# Altium PCB sdc_no-prech_pcb.PcbDoc
Units mm, origin at the board's own origin, x right, y up, seen from the top; angles counter-clockwise.
Board outline 80 x 55 mm, 2 copper layers (Top Layer, Bottom Layer); 41 components, 28 nets, 123 pads, 20 vias.
Unrouted connection lines stored in the file: 40.
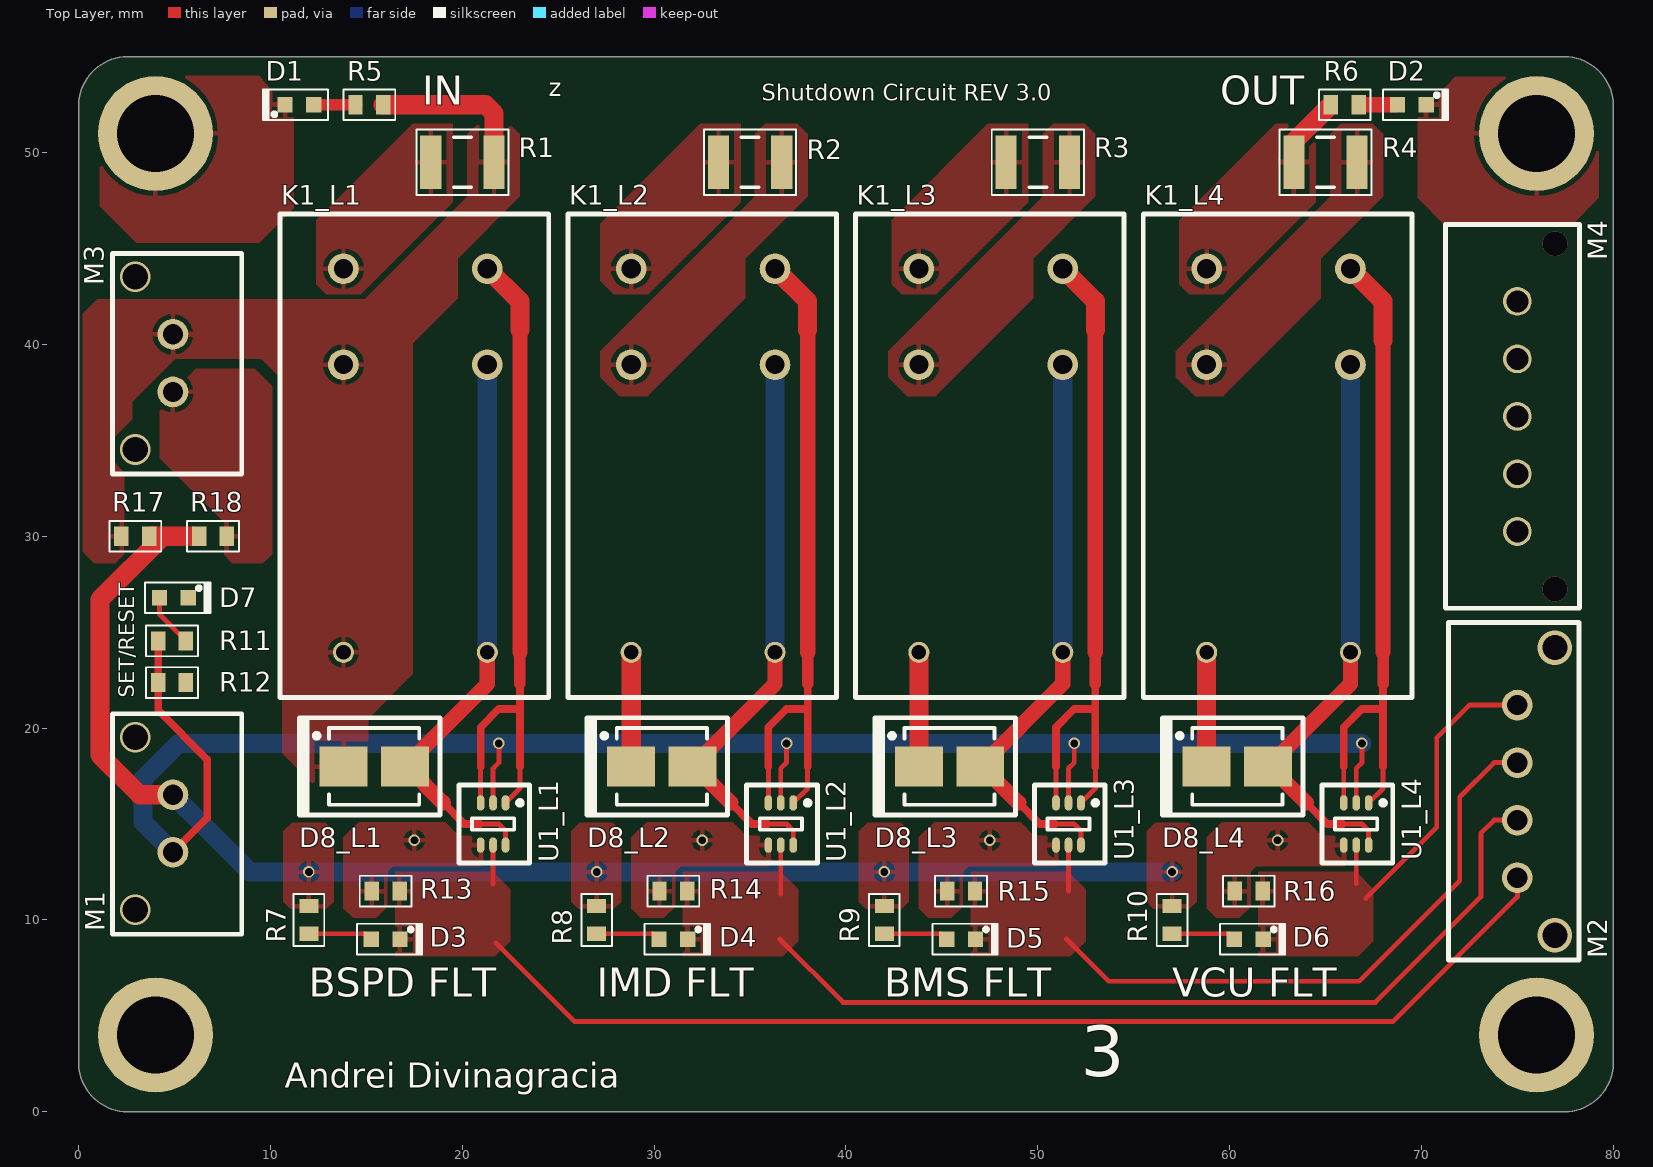
[diagram p0: Top Layer view]
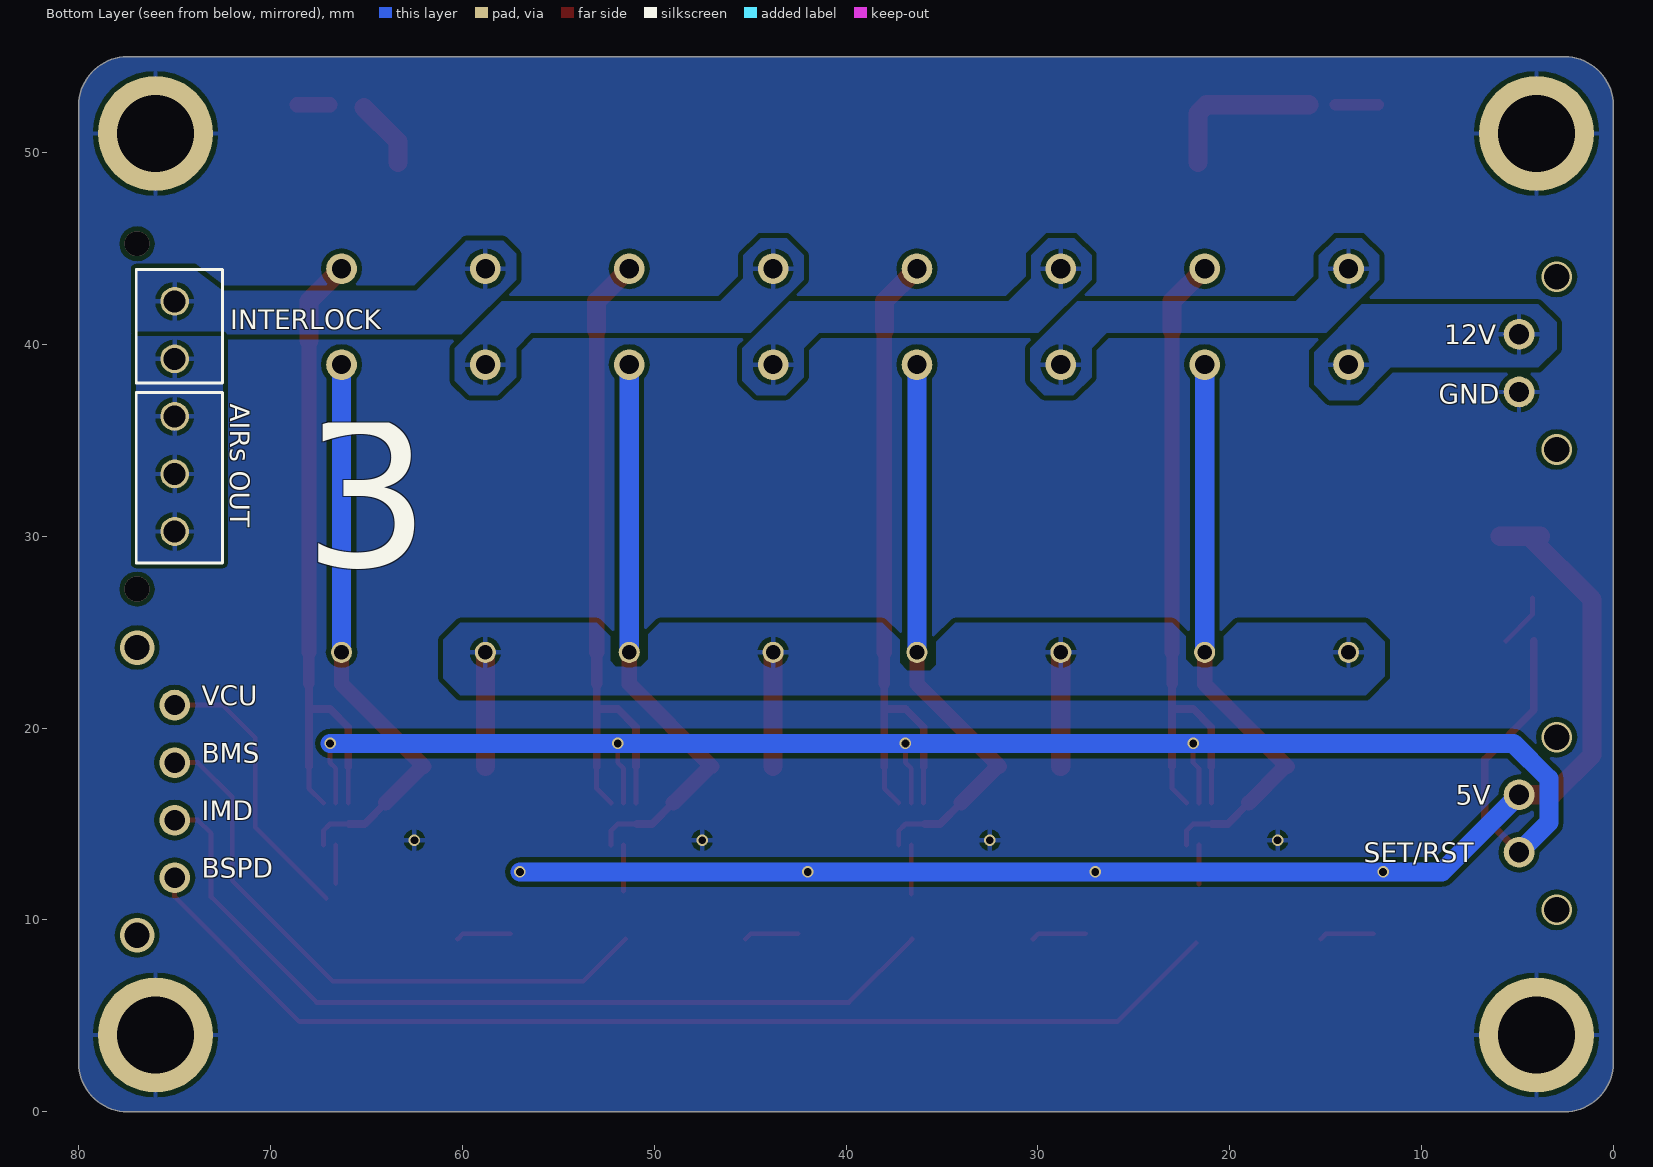
[diagram p1: Bottom Layer view, seen from below]

## Layer stack, top to bottom
Top Solder: solder mask 0.0102, Solder Resist, Dk 3.5
Top Layer: signal copper 0.0356
Dielectric 1: dielectric 0.32, FR-4, Dk 4.8
Bottom Layer: signal copper 0.0356
Bottom Solder: solder mask 0.0102, Solder Resist, Dk 3.5

## Board outline
0,52.46 cw(c2.54,52.46) 2.54,55 77.46,55 cw(c77.46,52.46) 80,52.46 80,2.54 cw(c77.46,2.54) 77.46,0 2.54,0 cw(c2.54,2.54) 0,2.54

## Design rules (kind name [scope] priority, off if disabled: settings)
Clearance [All] p1: gap=0.254 ignorepadtopadclearanceinfootprint=TRUE except(0: Arc-Hole Track-Hole SMDPad-Hole THPad-Hole Via-Hole Fill-Hole Poly-Hole Region-Hole Text-Hole)
PolygonConnect [All] p1: connectstyle=Relief reliefconductorwidth=0.254 reliefentries=4 polygonreliefangle="90 Angle" airgapwidth=0.254
RoutingVias [All] p1: holewidth=0.711 width=1.27 viastyle="Through Hole" minholewidth=0.711 minwidth=1.27 maxholewidth=0.711 maxwidth=1.27
SolderMaskExpansion [All] p1: expansion=0.102
Width [All] p1: maxlimit=1 minlimit=0.1 preferedwidth=0.254 minimp=50.000000 maximp=50.000000 favimp=50.000000
30 further rules are at their usual default settings.

## Classes and differential pairs
channel class Latch: L1 L2 L3 L4
component class shutdown_circuit: D1 D2 D3 D4 D5 D6 D7 M1 M2 M3 M4 R1 R2 R3 R4 R5 R6 R7 R8 R9 R10 R11 R12 R13 R14 R15 R16 R17 R18
component class L4: D8_L4 K1_L4 U1_L4
component class L3: D8_L3 K1_L3 U1_L3
component class L2: D8_L2 K1_L2 U1_L2
component class L1: D8_L1 K1_L1 U1_L1

## Components (designator, comment, footprint, x,y, rotation, side; value= is the part's Value field where it differs from the comment)
D1 "BLUE" "LED 0603" 11.5,52.5 r180 top
D2 "BLUE" "LED 0603" 69.5,52.5 r0 top
D3 "YELLOW" "LED 0603" 16,9 r0 top
D4 "YELLOW" "LED 0603" 31,9 r0 top
D5 "YELLOW" "LED 0603" 46,9 r0 top
D6 "YELLOW" "LED 0603" 61,9 r0 top
D7 "YELLOW" "LED 0603" 4.963,26.798 r0 top
D8_L1 "SD560BTR" DIODE 15.4,18 r0 top (schematic designator D8)
D8_L2 "SD560BTR" DIODE 30.4,18 r0 top (schematic designator D8)
D8_L3 "SD560BTR" DIODE 45.4,18 r0 top (schematic designator D8)
D8_L4 "SD560BTR" DIODE 60.4,18 r0 top (schematic designator D8)
K1_L1 "5-1419124-6" "RELAY DPST SDC" 24,22 r90 top (schematic designator K1)
K1_L2 "5-1419124-6" "RELAY DPST SDC" 39,22 r90 top (schematic designator K1)
K1_L3 "5-1419124-6" "RELAY DPST SDC" 54,22 r90 top (schematic designator K1)
K1_L4 "5-1419124-6" "RELAY DPST SDC" 69,22 r90 top (schematic designator K1)
M1 "0436500228" "2-PIN MOLEX" 5,15 r270 top
M2 "0436500428" "4-PIN MOLEX" 74.91,16.7 r90 top
M3 "0436500228" "2-PIN MOLEX" 5,39 r270 top
M4 "5pin" "5-PIN MOLEX" 75,30.25 r90 top
R1 "0Ω" "RESISTOR 1210" 20,49.5 r180 top
R2 "0Ω" "RESISTOR 1210" 35,49.5 r180 top
R3 "0Ω" "RESISTOR 1210" 50,49.5 r180 top
R4 "0Ω" "RESISTOR 1210" 65,49.5 r180 top
R5 "1KΩ" "RESISTOR 0603" 15.15,52.5 r180 top
R6 "1KΩ" "RESISTOR 0603" 66,52.5 r0 top
R7 "220Ω" "RESISTOR 0603" 12,10 r270 top
R8 "220Ω" "RESISTOR 0603" 27,10 r90 top
R9 "220Ω" "RESISTOR 0603" 42,10 r90 top
R10 "220Ω" "RESISTOR 0603" 57,10 r270 top
R11 "1KΩ" "RESISTOR 0603" 4.861,24.548 r0 top
R12 "10KΩ" "RESISTOR 0603" 4.861,22.373 r0 top
R13 "10KΩ" "RESISTOR 0603" 16,11.5 r180 top
R14 "10KΩ" "RESISTOR 0603" 31,11.5 r180 top
R15 "10KΩ" "RESISTOR 0603" 46,11.5 r180 top
R16 "10KΩ" "RESISTOR 0603" 61,11.5 r180 top
R17 "1.4KΩ" "RESISTOR 0603" 2.95,30 r180 top
R18 "1KΩ" "RESISTOR 0603" 7,30 r180 top
U1_L1 "SSM6N7002CFU,LF" "N-MOSFET (2 FETS)" 21.6,15 r270 top (schematic designator U1)
U1_L2 "SSM6N7002CFU,LF" "N-MOSFET (2 FETS)" 36.6,15 r270 top (schematic designator U1)
U1_L3 "SSM6N7002CFU,LF" "N-MOSFET (2 FETS)" 51.6,15 r270 top (schematic designator U1)
U1_L4 "SSM6N7002CFU,LF" "N-MOSFET (2 FETS)" 66.6,15 r270 top (schematic designator U1)

## Footprints (in the part's own frame and the unit in brackets; to place one, negate y for a bottom-side part, rotate by r counter-clockwise, add the part's x,y. Pads: shape width x height; smd on the part's side, far side on the other; paste and mask are expansions set on the pad)
"2-PIN MOLEX" [mm]
  round 1.6 hole 1.06: 1(-1.525,-0.09) 2(1.475,-0.09)
  silkscreen extent -5.75,-3.25 5.75,3.5, body extent -4.82,-2.47 4.83,3.14, height 9.95
"4-PIN MOLEX" [mm]
  round 1.6 hole 1.06: 1(-4.5,-0.09) 2(-1.5,-0.09) 3(1.5,-0.09) 4(4.5,-0.09)
  silkscreen extent -8.8,-3.3 8.8,3.5, body extent -7.82,-2.47 7.83,3.14, height 9.95
"5-PIN MOLEX" [mm]
  round 1.5 hole 1.15: 1(0,0) 2(3,0) 3(6,0) 4(9,0) 5(12,0)
  silkscreen extent -4,-3.25 16,3.75, body extent -3.32,-2.47 15.32,3.14, height 10.45
DIODE [mm] "Molded Diode, 2-Leads, Body 4.38x3.62mm, IPC Medium Density"
  rect 2.5x2.1 smd: 1(1.6,0) 2(-1.6,0)
  silkscreen extent -3.9,-2.54 3.43,2.54, body extent -2.35,-1.97 2.35,1.97, height 2.6
"LED 0603" [mm]
  rect 0.8x0.8 smd: 1(-0.75,0) 2(0.75,0)
  silkscreen extent -1.5,-0.8 1.9,0.8, body extent -0.8,-0.4 0.8,0.4, height 0.39
"N-MOSFET (2 FETS)" [mm] "TSOP, 6-Leads, Body 2.00x1.25mm, Pitch 0.65mm, IPC Medium Density"
  oval 0.8x0.4 smd: 1(-1.1,0.65) 2(-1.1,0) 3(-1.1,-0.65) 4(1.1,-0.65) 5(1.1,0) 6(1.1,0.65)
  silkscreen extent -2.03,-1.78 2.03,1.9, body extent -1.05,-1.1 1.05,1.1, height 1.1
"RELAY DPST SDC" [mm]
  round 1.1 hole 0.762: 1(1.95,2.7) 6(1.95,10.2)
  round 1.6 hole 1: 2(16.95,2.7) 3(21.95,2.7) 4(21.95,10.2) 5(16.95,10.2)
  silkscreen extent -0.4,-0.5 24.8,13.5, body extent 0,0 24.4,12.9, height 24.51
"RESISTOR 0603" [mm] "Chip Resistor, 2-Leads, Body 1.58x0.85mm, IPC Medium Density"
  rect 0.75x1 smd: 1(-0.725,0) 2(0.725,0)
  silkscreen extent -1.35,-0.8 1.35,0.8, body extent -0.82,-0.48 0.82,0.47, height 0.5
"RESISTOR 1210" [mm] "Chip Resistor, 2-Leads, Body 3.20x2.50mm, IPC Medium Density"
  rect 1.1x2.8 smd: 1(-1.65,0) 2(1.65,0)
  silkscreen extent -2.4,-1.7 2.4,1.7, body extent -1.7,-1.35 1.7,1.35, height 0.6

## Part data
D1 D2: library part LTST-C191TBKT-5A, "LED BLUE CLEAR CHIP SMD", Case/Package=0603, Case Code (Metric)=1608, Color=Blue, Forward Current=20mA, Forward Voltage=2.8V, Lens Color=Colorless, Manufacturer="Vishay Lite-On", Max Operating Temperature=80°C, Min Operating Temperature=-20°C, Package Quantity=5000, Supplier Part Number 1=160-2212-6-ND, Test Current=5mA, Voltage=29V, Case Code (Imperial)=0603, Category=Optoelectronics, ComponentLink1Description=http://optoelectronics.liteon.com/upload/download/DS22-2003-020/LTST-C191TBKT-5A.pdf?src-supplier=Digi-Key, ComponentLink1URL=http://optoelectronics.liteon.com/upload/download/DS22-2003-020/LTST-C191TBKT-5A.pdf?src-supplier=Digi-Key, ComponentLink2Description=http://components.arrow.com/part/dataview/52218576S9813001N1331?src-supplier=Arrow, ComponentLink2URL=http://components.arrow.com/part/dataview/52218576S9813001N1331?src-supplier=Arrow, ComponentLink3Description=http://optoelectronics.liteon.com/zh-cn/api/DwonloadFileHandler.ashx?txtSpecNo=DS22-2003-020&txtPartNo=LTST-C191TBKT-5A&src-supplier=Avnet, ComponentLink3URL=http://optoelectronics.liteon.com/zh-cn/api/DwonloadFileHandler.ashx?txtSpecNo=DS22-2003-020&txtPartNo=LTST-C191TBKT-5A&src-supplier=Avnet, ComponentLink4Description=http://www.mouser.com/ds/2/239/LTST-C191TBKT-5A-1150649.pdf?src-supplier=Mouser, ComponentLink4URL=http://www.mouser.com/ds/2/239/LTST-C191TBKT-5A-1150649.pdf?src-supplier=Mouser, Dominant Wavelength=473nm, Height=0.55mm, Illumination Color=Blue, Length=1.6mm, Lens Style=Diffused,Colorless,Rectangular, Lens Transparency=Clear, Luminous Intensity=15mcd, Manufacturer Part Number=LTST-C191TBKT-5A, Mount="Surface Mount", Number of LEDs=1, Number of Pins=2, Packaging="Tape and Reel", Pricing 1="1=0.5, 10=0.359, 100=0.1596, 500=0.11172, 1000=0.09177, 2500=0.0798 (USD)", Radiation Hardening=No, Stock 1=9654, Supplier 1=Digi-Key, Viewing Angle=130°, Width=0.8mm
D3 D4 D5 D6 D7: library part LTST-C191KSKT, "LED YELLOW CLEAR SMD", Case/Package=0603, Case Code (Metric)=1608, Color=Yellow, Forward Current=30mA, Forward Voltage=2.4V, Lens Color=Colorless, Manufacturer="Vishay Lite-On", Max Operating Temperature=85°C, Min Operating Temperature=-55°C, Package Quantity=1, Power Dissipation=75mW, Reverse Voltage=5V, Supplier Part Number 1=160-1448-6-ND, Test Current=20mA, Case Code (Imperial)=0603, Category=Optoelectronics, ComponentLink1Description=http://optoelectronics.liteon.com/upload/download/DS22-2000-224/LTST-C191KSKT.PDF?src-supplier=Digi-Key, ComponentLink1URL=http://optoelectronics.liteon.com/upload/download/DS22-2000-224/LTST-C191KSKT.PDF?src-supplier=Digi-Key, ComponentLink2Description=https://www.verical.com/server-webapp/html/getDatasheet?partID=141495&src-supplier=Verical, ComponentLink2URL=https://www.verical.com/server-webapp/html/getDatasheet?partID=141495&src-supplier=Verical, ComponentLink3Description=http://www.mouser.com/ds/2/239/LTST-C191KSKT-1141271.pdf?src-supplier=Mouser, ComponentLink3URL=http://www.mouser.com/ds/2/239/LTST-C191KSKT-1141271.pdf?src-supplier=Mouser, ComponentLink4Description=http://www1.futureelectronics.com/doc/LITE%20ON/LITE-ON%20LTST-C191KSKT.pdf?src-supplier=Future+Electronics, ComponentLink4URL=http://www1.futureelectronics.com/doc/LITE%20ON/LITE-ON%20LTST-C191KSKT.pdf?src-supplier=Future+Electronics, Depth=0.8mm, Dominant Wavelength=597nm, Height=0.55mm, Illumination Color=Yellow, Lead Free="Lead Free", Length=1.6mm, Lens Style=Diffused,Colorless,Rectangular,Clear, Lens Transparency=Clear, Luminous Intensity=180mcd, Manufacturer Part Number=LTST-C191KSKT, Mount="Surface Mount", Number of Elements=1, Number of LEDs=1, Number of Pins=2, Packaging="Tape and Reel", Power Rating=75mW, Pricing 1="1=0.29, 10=0.215, 100=0.1016, 500=0.06774, 1000=0.05306, 2500=0.05194 (USD)", Radiation Hardening=No, Stock 1=464545, Supplier 1=Digi-Key, Viewing Angle=130°, Wavelength=588nm, Width=0.8mm
D8_L1 D8_L2 D8_L3 D8_L4: "DIODE GEN PURP 600V 5A SMB", Average Rectified Current=5A, Case/Package=SMB, Manufacturer=SMC, Max Reverse Voltage (DC)=600V, Supplier Part Number 1=1655-1530-6-ND, Category="Discrete Semiconductor Products", ComponentLink1Description=http://www.smc-diodes.com/propdf/SD560B%20N1412%20REV.D.pdf?src-supplier=Digi-Key, ComponentLink1URL=http://www.smc-diodes.com/propdf/SD560B%20N1412%20REV.D.pdf?src-supplier=Digi-Key, Manufacturer Part Number=SD560BTR, Mount="Surface Mount", Packaging="Tape and Reel", Pricing 1="1=0.42, 10=0.309, 100=0.1468, 500=0.11978, 1000=0.08887 (USD)", Stock 1=90144, Supplier 1=Digi-Key
K1_L1 K1_L2 K1_L3 K1_L4: "General Purpose Relay, Osa Series, Power, Non Latching, Dpst-No, 12 Vdc, 3 A Rohs Compliant: Yes", Coil Current=45mA, Coil Power=600mW, Coil Resistance=270R, Coil Voltage (DC)=12V, Contact Current Rating=3A, Contact Voltage Rating (AC)=240V, Manufacturer="TE Connectivity", Max Operating Temperature=60°C, Min Operating Temperature=-30°C, Package Quantity=1000, Supplier Part Number 1=OSA-SS-212DM3,000-ND, Category=Relays, Coil Type=Non-Latching, ComponentLink1Description=http://www.farnell.com/datasheets/1652820.pdf?src-supplier=Farnell, ComponentLink1URL=http://www.farnell.com/datasheets/1652820.pdf?src-supplier=Farnell, ComponentLink2Description=http://www.farnell.com/cad/1652820.pdf?src-supplier=Element14, ComponentLink2URL=http://www.farnell.com/cad/1652820.pdf?src-supplier=Element14, ComponentLink3Description=http://www.te.com/commerce/DocumentDelivery/DDEController?Action=srchrtrv&DocNm=5-1419124-6&DocType=Customer+Drawing&DocLang=English&src-supplier=Digi-Key, ComponentLink3URL=http://www.te.com/commerce/DocumentDelivery/DDEController?Action=srchrtrv&DocNm=5-1419124-6&DocType=Customer+Drawing&DocLang=English&src-supplier=Digi-Key, Contact Material=Silver, ELV=Compliant, Height=0.976inch, Length=24.4mm, Manufacturer Part Number=5-1419124-6, Mount="Through Hole", Operate Time=20ms, Packaging=Box, Pricing 1="1=2.54, 10=2.385, 25=2.1204, 50=2.0142, 100=1.9083, 250=1.69624, 500=1.59022, 1000=1.48421, 5000=1.4312 (USD)", REACH SVHC=Unknown, Relay Type="General Purpose", Release Time=10ms, Stock 1=2593, Supplier 1=Digi-Key, Termination=PCB, Throw Configuration=DPST, Weight=13g, Width=12.9mm
M1 M3: "Conn Power HDR 2 POS 3mm Solder ST Thru-Hole 2 Terminal 1 Port Micro-Fit 3.0™ Tray", Color=Black, Manufacturer=Molex, Max Operating Temperature=105°C, Min Operating Temperature=-40°C, Package Quantity=3264, Supplier Part Number 1=WM10658-ND, Category="Connectors, Interconnects", ComponentLink1Description=http://www.molex.com/pdm_docs/sd/436500228_sd.pdf?src-supplier=Digi-Key, ComponentLink1URL=http://www.molex.com/pdm_docs/sd/436500228_sd.pdf?src-supplier=Digi-Key, ComponentLink2Description=http://components.arrow.com/part/dataview/2942358S8703676N3303?src-supplier=Arrow, ComponentLink2URL=http://components.arrow.com/part/dataview/2942358S8703676N3303?src-supplier=Arrow, Connector Type="Male Pin", Contact Material=Brass, Contact Plating=Gold, Depth=5.57mm, Fastening Type=Ramp, Housing Material=Polymer, Length=9.65mm, Manufacturer Part Number=0436500228, Mount="Through Hole", Number of Contacts=2, Number of Ports=1, Number of Positions=2, Number of Rows=1, Number of Terminals=2, Orientation=Straight, Packaging=Tray, Pitch=3mm, Pricing 1="1=0.9, 10=0.795, 100=0.6857, 500=0.56106, 1000=0.49872, 5000=0.43638, 10000=0.41456 (USD)", Stock 1=9247, Supplier 1=Digi-Key, Termination=Solder
M2: "Conn Power HDR 4 POS 3mm Solder ST Thru-Hole 4 Terminal 1 Port Micro-Fit 3.0™ Tray", Color=Black, Manufacturer=Molex, Max Operating Temperature=105°C, Min Operating Temperature=-40°C, Package Quantity=2040, Supplier Part Number 1=WM10669-ND, Category="Connectors, Interconnects", ComponentLink1Description=http://www.molex.com/pdm_docs/sd/436500428_sd.pdf?src-supplier=Digi-Key, ComponentLink1URL=http://www.molex.com/pdm_docs/sd/436500428_sd.pdf?src-supplier=Digi-Key, ComponentLink2Description=http://www.molex.com/webdocs/datasheets/pdf/en-us/0436500428_PCB_HEADERS.pdf?src-supplier=Avnet, ComponentLink2URL=http://www.molex.com/webdocs/datasheets/pdf/en-us/0436500428_PCB_HEADERS.pdf?src-supplier=Avnet, Connector Type="Male Pin", Contact Material=Brass, Contact Plating=Gold, Depth=5.57mm, Fastening Type=Ramp, Housing Material=Polymer, Length=15.65mm, Manufacturer Part Number=0436500428, Mount="Through Hole", Number of Contacts=4, Number of Ports=1, Number of Positions=4, Number of Rows=1, Number of Terminals=4, Orientation=Straight, Packaging=Tray, Pitch=3mm, Pricing 1="1=1.44, 10=1.265, 100=1.0916, 500=0.89316, 1000=0.79392, 5000=0.69468, 10000=0.65995 (USD)", Stock 1=1193, Supplier 1=Digi-Key, Termination=Solder
M4: library part 0436500527, "CONN HEADER VERT 5POS 3MM", Supplier Part Number 1=0436500527-ND, Supplier 1=Digi-Key
R1 R2 R3 R4: library part CRCW12100000Z0EA, "RES SMD 0 OHM JUMPER 1/2W 1210", Case/Package=1210, Case Code (Metric)=3225, Manufacturer="Vishay Dale", Max Operating Temperature=155°C, Max Power Dissipation=500mW, Min Operating Temperature=-55°C, Package Quantity=1, Resistance=0mR, Supplier Part Number 1=541-0.0VDKR-ND, Temperature Coefficient=0ppm/°C, Voltage Rating=200V, Case Code (Imperial)=1210, Category=Resistors, ComponentLink1Description=http://www.vishay.com/docs/20035/dcrcwe3.pdf?src-supplier=Digi-Key, ComponentLink1URL=http://www.vishay.com/docs/20035/dcrcwe3.pdf?src-supplier=Digi-Key, ComponentLink2Description=http://www.vishay.com/docs/20035/dcrcwe3.pdf?src-supplier=Future+Electronics, ComponentLink2URL=http://www.vishay.com/docs/20035/dcrcwe3.pdf?src-supplier=Future+Electronics, ComponentLink3Description=http://www.farnell.com/datasheets/2793682.pdf?src-supplier=Element14, ComponentLink3URL=http://www.farnell.com/datasheets/2793682.pdf?src-supplier=Element14, ComponentLink4Description=http://www.mouser.com/ds/2/427/dcrcwe3-109170.pdf?src-supplier=Mouser, ComponentLink4URL=http://www.mouser.com/ds/2/427/dcrcwe3-109170.pdf?src-supplier=Mouser, ComponentLink5Description=https://www.alliedelec.com/m/d/0c934d6939ccefa68dbe0b96d821c8cf.pdf?src-supplier=Allied+Electronics, ComponentLink5URL=https://www.alliedelec.com/m/d/0c934d6939ccefa68dbe0b96d821c8cf.pdf?src-supplier=Allied+Electronics, ComponentLink6Description=http://www.vishay.com/docs/20035/dcrcwe3.pdf?src-supplier=Avnet, ComponentLink6URL=http://www.vishay.com/docs/20035/dcrcwe3.pdf?src-supplier=Avnet, ComponentLink7Description=http://www.vishay.com/docs/20035/dcrcwe3.pdf?src-supplier=Avnet+Europe, ComponentLink7URL=http://www.vishay.com/docs/20035/dcrcwe3.pdf?src-supplier=Avnet+Europe, ComponentLink8Description=http://uk.rs-online.com/webdocs/0d98/0900766b80d98bd1.pdf?src-supplier=RSComponents, ComponentLink8URL=http://uk.rs-online.com/webdocs/0d98/0900766b80d98bd1.pdf?src-supplier=RSComponents, Composition="Thick Film", Contact Plating=Tin, Depth=2.5mm, Features="Automotive AEC-Q200", Height=0.55mm, Length=3.2mm, Manufacturer Part Number=CRCW12100000Z0EA, Military Standard=Not, Mount="Surface Mount", Number of Terminations=2, Packaging="Tape and Reel", Power Rating=500mW, Pricing 1="1=0.21, 10=0.182, 25=0.132, 50=0.0958, 100=0.071, 250=0.05444, 500=0.0429, 1000=0.0297 (USD)", Radiation Hardening=No, REACH SVHC="No SVHC", Stock 1=916328, Supplier 1=Digi-Key, Termination=SMD/SMT, Weight=0.000564oz, Width=0.098inch
R5 R6 R11 R18: library part CRCW06031K00FKEA, "RES SMD 1K OHM 1% 1/10W 0603", Case/Package=0603, Case Code (Metric)=1608, Manufacturer="Vishay Dale", Max Operating Temperature=155°C, Max Power Dissipation=100mW, Min Operating Temperature=-55°C, Package Quantity=10, Resistance=1kR, Supplier Part Number 1=541-1.00KHCT-ND, Temperature Coefficient=100ppm/°C, Tolerance=1%, Voltage Rating=75V, Case Code (Imperial)=0603, Category=Resistors, ComponentLink1Description=http://www.vishay.com/docs/20035/dcrcwe3.pdf?src-supplier=Digi-Key, ComponentLink1URL=http://www.vishay.com/docs/20035/dcrcwe3.pdf?src-supplier=Digi-Key, ComponentLink2Description=http://uk.rs-online.com/webdocs/0d98/0900766b80d98afc.pdf?src-supplier=RSComponents, ComponentLink2URL=http://uk.rs-online.com/webdocs/0d98/0900766b80d98afc.pdf?src-supplier=RSComponents, ComponentLink3Description=http://www.vishay.com/docs/20035/dcrcwe3.pdf?src-supplier=Avnet, ComponentLink3URL=http://www.vishay.com/docs/20035/dcrcwe3.pdf?src-supplier=Avnet, ComponentLink4Description=http://www.vishay.com/docs/20035/dcrcwe3.pdf?src-supplier=Avnet+Asia, ComponentLink4URL=http://www.vishay.com/docs/20035/dcrcwe3.pdf?src-supplier=Avnet+Asia, ComponentLink5Description=http://www.farnell.com/datasheets/2310790.pdf?src-supplier=Element14, ComponentLink5URL=http://www.farnell.com/datasheets/2310790.pdf?src-supplier=Element14, ComponentLink6Description=https://www.distrelec.biz/Web/Downloads/a_/en/flD-CRCW-e3_data_en.pdf?mime=application%2Fpdf&src-supplier=Distrelec, ComponentLink6URL=https://www.distrelec.biz/Web/Downloads/a_/en/flD-CRCW-e3_data_en.pdf?mime=application%2Fpdf&src-supplier=Distrelec, ComponentLink7Description=http://www.vishay.com/docs/20035/dcrcwe3.pdf?src-supplier=Future+Electronics, ComponentLink7URL=http://www.vishay.com/docs/20035/dcrcwe3.pdf?src-supplier=Future+Electronics, ComponentLink8Description=http://www.vishay.com/docs/20035/dcrcwe3.pdf?src-supplier=Avnet+Europe, ComponentLink8URL=http://www.vishay.com/docs/20035/dcrcwe3.pdf?src-supplier=Avnet+Europe, Composition="Thick Film", Contact Plating=Tin, Depth=0.85mm, Features="Automotive AEC-Q200", Height=0.45mm, Lead Free="Lead Free", Length=1.55mm, Manufacturer Part Number=CRCW06031K00FKEA, Military Standard=Not, Mount="Surface Mount", Number of Pins=2, Number of Terminations=2, Packaging="Tape and Reel", Power Rating=100mW, Pricing 1="1=0.1, 10=0.034, 100=0.0139, 1000=0.00623, 2500=0.0054 (USD)", Radiation Hardening=No, REACH SVHC=Unknown, Stock 1=1811474, Supplier 1=Digi-Key, Termination=SMD/SMT, Voltage Rating (DC)=75V, Weight=7.1E-05oz, Width=0.033inch
R7 R8 R9 R10: library part CRCW0603220RJNEA, "RES SMD 220 OHM 5% 1/10W 0603", Case/Package=0603, Case Code (Metric)=1608, Manufacturer=Vishay, Max Operating Temperature=155°C, Max Power Dissipation=100mW, Min Operating Temperature=-55°C, Package Quantity=1, Resistance=220R, Supplier Part Number 1=541-220GCT-ND, Temperature Coefficient=200ppm/°C, Tolerance=5%, Voltage Rating=75V, Case Code (Imperial)=0603, Category=Resistors, ComponentLink1Description=http://www.vishay.com/docs/20035/dcrcwe3.pdf?src-supplier=Digi-Key, ComponentLink1URL=http://www.vishay.com/docs/20035/dcrcwe3.pdf?src-supplier=Digi-Key, ComponentLink2Description=http://www.vishay.com/docs/20035/dcrcwe3.pdf?src-supplier=Avnet, ComponentLink2URL=http://www.vishay.com/docs/20035/dcrcwe3.pdf?src-supplier=Avnet, ComponentLink3Description=http://www.alliedelec.com/m/d/0c934d6939ccefa68dbe0b96d821c8cf.pdf?src-supplier=Allied+Electronics, ComponentLink3URL=http://www.alliedelec.com/m/d/0c934d6939ccefa68dbe0b96d821c8cf.pdf?src-supplier=Allied+Electronics, ComponentLink4Description=http://www.farnell.com/datasheets/2045673.pdf?src-supplier=Element14, ComponentLink4URL=http://www.farnell.com/datasheets/2045673.pdf?src-supplier=Element14, ComponentLink5Description=http://www.mouser.com/ds/2/427/dcrcwe3-109170.pdf?src-supplier=Mouser, ComponentLink5URL=http://www.mouser.com/ds/2/427/dcrcwe3-109170.pdf?src-supplier=Mouser, Composition="Thick Film", Contact Plating=Tin, Depth=0.85mm, Features="Automotive AEC-Q200", Height=0.45mm, Length=1.55mm, Manufacturer Part Number=CRCW0603220RJNEA, Military Standard=Not, Mount="Surface Mount", Number of Terminations=2, Packaging="Tape and Reel", Power Rating=100mW, Pricing 1="1=0.1, 10=0.031, 100=0.0125, 1000=0.00562, 2500=0.00488 (USD)", Radiation Hardening=No, REACH SVHC=Unknown, Stock 1=171552, Supplier 1=Digi-Key, Termination=SMD/SMT, Weight=7.1E-05oz, Width=0.033inch, Working Voltage=75V
R12 R13 R14 R15 R16: library part CRCW060310K0FKEA, "RES SMD 10K OHM 1% 1/10W 0603", Case/Package=0603, Case Code (Metric)=1608, Manufacturer=Vishay, Max Operating Temperature=155°C, Max Power Dissipation=100mW, Min Operating Temperature=-55°C, Package Quantity=10, Resistance=10kR, Supplier Part Number 1=541-10.0KHCT-ND, Temperature Coefficient=100ppm/°C, Tolerance=1%, Voltage Rating=75V, Case Code (Imperial)=0603, Category=Resistors, ComponentLink1Description=http://www.vishay.com/docs/20008/dcrcw.pdf?src-supplier=Avnet+Europe, ComponentLink1URL=http://www.vishay.com/docs/20008/dcrcw.pdf?src-supplier=Avnet+Europe, ComponentLink2Description=https://www.verical.com/server-webapp/html/getDatasheet?partID=86831&src-supplier=Verical, ComponentLink2URL=https://www.verical.com/server-webapp/html/getDatasheet?partID=86831&src-supplier=Verical, ComponentLink3Description=http://www.farnell.com/datasheets/2310790.pdf?src-supplier=Allied+Electronics, ComponentLink3URL=http://www.farnell.com/datasheets/2310790.pdf?src-supplier=Allied+Electronics, ComponentLink4Description=http://www.vishay.com/docs/20035/dcrcwe3.pdf?src-supplier=Digi-Key, ComponentLink4URL=http://www.vishay.com/docs/20035/dcrcwe3.pdf?src-supplier=Digi-Key, ComponentLink5Description=http://www.farnell.com/datasheets/2310790.pdf?src-supplier=Mouser, ComponentLink5URL=http://www.farnell.com/datasheets/2310790.pdf?src-supplier=Mouser, ComponentLink6Description=http://www.farnell.com/datasheets/2310790.pdf?src-supplier=Element14, ComponentLink6URL=http://www.farnell.com/datasheets/2310790.pdf?src-supplier=Element14, ComponentLink7Description=http://www.farnell.com/datasheets/2310790.pdf?src-supplier=Avnet, ComponentLink7URL=http://www.farnell.com/datasheets/2310790.pdf?src-supplier=Avnet, ComponentLink8Description=http://www.vishay.com/docs/20035/dcrcwe3.pdf?src-supplier=Future+Electronics, ComponentLink8URL=http://www.vishay.com/docs/20035/dcrcwe3.pdf?src-supplier=Future+Electronics, ComponentLink9Description=http://uk.rs-online.com/webdocs/0d98/0900766b80d98afc.pdf?src-supplier=RSComponents, ComponentLink9URL=http://uk.rs-online.com/webdocs/0d98/0900766b80d98afc.pdf?src-supplier=RSComponents, ComponentLink10Description=http://www.farnell.com/datasheets/2310790.pdf?src-supplier=Distrelec, ComponentLink10URL=http://www.farnell.com/datasheets/2310790.pdf?src-supplier=Distrelec, Composition="Thick Film", Contact Plating=Tin,Lead, Depth=0.85mm, Features="Automotive AEC-Q200", Height=0.45mm, Lead Free="Lead Free", Length=1.55mm, Manufacturer Part Number=CRCW060310K0FKEA, Military Standard=Not, Number of Pins=2, Number of Terminations=2, Packaging="Tape and Reel", Power Rating=100mW, Pricing 1="1=0.1, 10=0.034, 100=0.0139, 1000=0.00623, 2500=0.0054 (USD)", Radiation Hardening=No, REACH SVHC=Unknown, Stock 1=1434373, Supplier 1=Digi-Key, Termination=SMD/SMT, Voltage Rating (DC)=75V, Weight=7.1E-05oz, Width=0.033inch
R17: library part CRCW06031K40FKEA, "RES SMD 1.4K OHM 1% 1/10W 0603", Case/Package=0603, Case Code (Metric)=1608, Manufacturer=Vishay, Max Operating Temperature=155°C, Max Power Dissipation=100mW, Min Operating Temperature=-55°C, Package Quantity=10, Resistance=1.4kR, Supplier Part Number 1=541-1.40KHCT-ND, Temperature Coefficient=100ppm/°C, Tolerance=1%, Voltage Rating=75V, Case Code (Imperial)=0603, Category=Resistors, ComponentLink1Description=http://www.vishay.com/docs/20035/dcrcwe3.pdf?src-supplier=Digi-Key, ComponentLink1URL=http://www.vishay.com/docs/20035/dcrcwe3.pdf?src-supplier=Digi-Key, ComponentLink2Description=https://www.alliedelec.com/m/d/0c934d6939ccefa68dbe0b96d821c8cf.pdf?src-supplier=Allied+Electronics, ComponentLink2URL=https://www.alliedelec.com/m/d/0c934d6939ccefa68dbe0b96d821c8cf.pdf?src-supplier=Allied+Electronics, ComponentLink3Description=http://www.vishay.com/doc?20035?src-supplier=Mouser, ComponentLink3URL=http://www.vishay.com/doc?20035?src-supplier=Mouser, ComponentLink4Description=http://www.farnell.com/datasheets/2045673.pdf?src-supplier=Element14, ComponentLink4URL=http://www.farnell.com/datasheets/2045673.pdf?src-supplier=Element14, ComponentLink5Description=http://www.farnell.com/datasheets/2111203.pdf?src-supplier=Element14, ComponentLink5URL=http://www.farnell.com/datasheets/2111203.pdf?src-supplier=Element14, ComponentLink6Description=http://uk.rs-online.com/webdocs/0d98/0900766b80d98afc.pdf?src-supplier=RSComponents, ComponentLink6URL=http://uk.rs-online.com/webdocs/0d98/0900766b80d98afc.pdf?src-supplier=RSComponents, ComponentLink7Description=http://www.vishay.com/docs/20035/dcrcwe3.pdf?src-supplier=Avnet+Europe, ComponentLink7URL=http://www.vishay.com/docs/20035/dcrcwe3.pdf?src-supplier=Avnet+Europe, Composition="Thick Film", Contact Plating=Tin, Depth=0.85mm, Features="Automotive AEC-Q200", Height=0.45mm, Lead Free="Lead Free", Length=1.55mm, Manufacturer Part Number=CRCW06031K40FKEA, Military Standard=Not, Number of Pins=2, Number of Terminations=2, Packaging="Tape and Reel", Power Rating=100mW, Pricing 1="1=0.1, 10=0.034, 100=0.0139, 1000=0.00623, 2500=0.0054 (USD)", Radiation Hardening=No, REACH SVHC=Unknown, Stock 1=516, Supplier 1=Digi-Key, Termination=SMD/SMT, Voltage Rating (DC)=75V, Weight=7.1E-05oz, Width=0.033inch, Working Voltage=75V
U1_L1 U1_L2 U1_L3 U1_L4: "MOSFET 2N-CH 60V 0.17A US6", Case/Package=SOT-363, Continuous Drain Current (ID)=170mA, Drain to Source Voltage (Vdss)=60V, Input Capacitance=17pF, Manufacturer=Toshiba, Max Power Dissipation=285mW, Supplier Part Number 1=SSM6N7002CFULFDKR-ND, Category="Discrete Semiconductor Products", ComponentLink1Description=https://toshiba.semicon-storage.com/info/docget.jsp?did=29875&prodName=SSM6N7002CFU&src-supplier=Digi-Key, ComponentLink1URL=https://toshiba.semicon-storage.com/info/docget.jsp?did=29875&prodName=SSM6N7002CFU&src-supplier=Digi-Key, ComponentLink2Description=http://www.mouser.com/ds/2/408/SSM6N7002CFU_datasheet_en_20150413-736631.pdf?src-supplier=Mouser, ComponentLink2URL=http://www.mouser.com/ds/2/408/SSM6N7002CFU_datasheet_en_20150413-736631.pdf?src-supplier=Mouser, FET Type="2 N-Channel", Manufacturer Part Number=SSM6N7002CFU,LF, Mount="Surface Mount", Packaging="Tape and Reel", Pricing 1="1=0.27, 10=0.221, 100=0.0906, 500=0.0756, 1000=0.05253 (USD)", Rds On Max=3.9R, Stock 1=13946, Supplier 1=Digi-Key

## Free pads (board coordinates)
  round 6 hole 4: ""(4,4) ""(4,51) ""(76,4) ""(76,51)

## Via types
v1: diameter 0.6, hole 0.4, Top Layer to Bottom Layer, 12 vias
v2: diameter 1.6, hole 1.32, Top Layer to Bottom Layer, 4 vias
v3: diameter 1.3, hole 1.3, Top Layer to Bottom Layer, 2 vias
v4: diameter 1.8, hole 1.32, Top Layer to Bottom Layer, 2 vias

## Nets (pads, with @x,y where several pads share a name; then routed paths per layer and width w, separated by ;. In a path a pad name is that pad's centre, name@x,y a point inside that pad or via, vN(x,y) a via of type N, cw(c..) or ccw(c..) an arc to the next point about the centre after c; other vN are vias at no path point)
5V: M1.1 R7.1 R8.2 R9.2 R10.1 R17.1 R18.2 | length 73.3
  Top Layer w1: R17.1@3.8,30 4.4,30 ; M1.1 3.175,16.525 1.1,18.6 1.1,26.7 4.4,30 ; R18.2@5.905,30 4.4,30
  Bottom Layer w1: M1.1 8.935,12.5 v1(57,12.5)
  other v1: 12,12.5 27,12.5 42,12.5
12V: D8_L1.2 D8_L2.2 D8_L3.2 D8_L4.2 K1_L1.5 K1_L1.6 K1_L2.6 K1_L3.6 K1_L4.6 M3.1 R1.1 R5.1 R17.2 | length 26.4
  Top Layer w1: R5.1 21.2,52.5 21.65,52.05 R1.1 ; D8_L2.2 K1_L2.6 ; D8_L3.2 K1_L3.6 ; D8_L4.2 K1_L4.6
AIR_OUT: M4.1 M4.2 M4.3 M4.4
"BMS Fault": D5.2 M2.3 R15.1 U1_L3.5 | length 34.1
  Top Layer w0.254: 51.5,9 53.7,6.8 66.75,6.8 72,12.05 72,16.41 73.79,18.2 M2.3 ; 51.6,11.5 U1_L3.5
"BSPD Fault": D3.2 M2.1 R13.1 U1_L1.5 | length 60.7
  Top Layer w0.254: 21.6,11.875 U1_L1.5 ; 21.75,8.8 25.85,4.7 68.5,4.7 75,11.2 M2.1
GND: D1.2 D2.2 D7.2 M3.2 pad. R12.2 R13.2 R14.2 R15.2 R16.2 R18.1 U1_L1.4 U1_L2.4 U1_L3.4 U1_L4.4
  other v1: 17.5,14.15 32.5,14.15 47.5,14.15 62.5,14.15
"IMD Fault": D4.2 M2.2 R14.1 U1_L2.5 | length 48.2
  Top Layer w0.254: 36.55,9 39.85,5.7 67.6,5.7 73.1,11.2 73.1,14.51 73.79,15.2 M2.2 ; 36.6,11.35 U1_L2.5
NetD1_1: D1.1 R5.2 | length 2.3
  Top Layer w0.6: D1.1 R5.2@14.5,52.5
NetD2_1: D2.1 R6.2 | length 1.7
  Top Layer w0.8: R6.2@66.9,52.5 D2.1@68.625,52.5
NetD3_1: D3.1 R7.2 | length 2.9
  Top Layer w0.254: R7.2@12.5,9.275 14.975,9.275 D3.1
NetD4_1: D4.1 R8.1 | length 2.9
  Top Layer w0.254: R8.1@27.5,9.275 29.975,9.275 D4.1
NetD5_1: D5.1 R9.1 | length 2.9
  Top Layer w0.254: R9.1@42.5,9.275 44.975,9.275 D5.1
NetD6_1: D6.1 R10.2 | length 2.9
  Top Layer w0.254: R10.2@57.5,9.275 59.975,9.275 D6.1
NetD7_1: D7.1 R11.2 | length 2.8
  Top Layer w0.254: D7.1 4.213,25.921 R11.2
NetD8_L1_1: D8_L1.1 K1_L1.1 K1_L1.2 U1_L1.6 | length 30
  Top Layer w0.254: 20.9,15 21.9,15 22.25,14.65 U1_L1.6
  Top Layer w0.4: 19,16.1 20.1,15 20.9,15
  Top Layer w0.8: D8_L1.1 21.3,22.3 K1_L1.1 ; D8_L1.1@17.1,18 19,16.1
  Bottom Layer w1: K1_L1.1 K1_L1.2
NetD8_L2_1: D8_L2.1 K1_L2.1 K1_L2.2 U1_L2.6 | length 30
  Top Layer w0.254: 35.9,15 36.9,15 37.25,14.65 U1_L2.6
  Top Layer w0.4: 34,16.1 35.1,15 35.9,15
  Top Layer w0.8: D8_L2.1 36.3,22.3 K1_L2.1 ; D8_L2.1@32.1,18 34,16.1
  Bottom Layer w1: K1_L2.1 K1_L2.2
NetD8_L3_1: D8_L3.1 K1_L3.1 K1_L3.2 U1_L3.6 | length 30.1
  Top Layer w0.254: 50.9,15 51.9,15 52.25,14.65 U1_L3.6
  Top Layer w0.4: 49,16.1 50.1,15 50.9,15
  Top Layer w0.8: 49,16.1 47.1,18 D8_L3.1 51.3,22.3 K1_L3.1
  Bottom Layer w1: K1_L3.1 K1_L3.2
NetD8_L4_1: D8_L4.1 K1_L4.1 K1_L4.2 U1_L4.6 | length 30
  Top Layer w0.254: 65.9,15 66.9,15 67.25,14.65 U1_L4.6
  Top Layer w0.4: 64,16.1 65.1,15 65.9,15
  Top Layer w0.8: D8_L4.1 66.3,22.3 K1_L4.1 ; D8_L4.1@62.1,18 64,16.1
  Bottom Layer w1: K1_L4.1 K1_L4.2
NetK1_L1_3: K1_L1.3 U1_L1.1 U1_L1.3 | length 35.3
  Top Layer w0.254: U1_L1.3 20.95,18 ; U1_L1.1 23,16.85 23,18
  Top Layer w0.4: 20.95,18 20.95,20.05 21.9,21 23,21 ; 23,18 23,21 ; 23,22.3 23,21
  Top Layer w0.6: 23,22.3 23,23.95
  Top Layer w0.8: 23,23.95 23,40.75
  Top Layer w1: K1_L1.3 23,42.25 23,40.75
NetK1_L2_3: K1_L2.3 U1_L2.1 U1_L2.3 | length 35.3
  Top Layer w0.254: U1_L2.3 35.95,18 ; U1_L2.1 38,16.85 38,18
  Top Layer w0.4: 35.95,18 35.95,20.05 36.9,21 38,21 ; 38,18 38,21 ; 38,22.3 38,21
  Top Layer w0.6: 38,22.3 38,23.95
  Top Layer w0.8: 38,23.95 38,40.75
  Top Layer w1: K1_L2.3 38,42.25 38,40.75
NetK1_L3_3: K1_L3.3 U1_L3.1 U1_L3.3 | length 35.3
  Top Layer w0.254: U1_L3.3 50.95,18 ; U1_L3.1 53,16.85 53,18
  Top Layer w0.4: 50.95,18 50.95,20.05 51.9,21 53,21 ; 53,18 53,21 ; 53,22.3 53,21
  Top Layer w0.6: 53,22.3 53,23.95
  Top Layer w0.8: 53,23.95 53,40.75
  Top Layer w1: K1_L3.3 53,42.25 53,40.75
NetK1_L4_3: K1_L4.3 U1_L4.1 U1_L4.3 | length 35.3
  Top Layer w0.254: U1_L4.3 65.95,18 ; U1_L4.1 68,16.85 68,18
  Top Layer w0.4: 65.95,18 65.95,20.05 66.9,21 68,21 ; 68,18 68,21 ; 68,22.3 68,21
  Top Layer w0.6: 68,22.3 68,23.95
  Top Layer w0.8: 68,23.95 68,40.2
  Top Layer w1: K1_L4.3 68,42.25 68,40.2
"RELAY L1/L2": K1_L1.4 K1_L2.5 R1.2 R2.1
"RELAY L2/L3": K1_L2.4 K1_L3.5 R2.2 R3.1
"RELAY L3/L4": K1_L3.4 K1_L4.5 R3.2 R4.1
"SDC END": K1_L4.4 M4.5 R4.2 R6.1 | length 3.6
  Top Layer w1: R4.2 63.35,50.575 R6.1@65.124,52.349
SET/RESET: M1.2 R11.1 R12.1 U1_L1.2 U1_L2.2 U1_L3.2 U1_L4.2 | length 94.5
  Top Layer w0.254: U1_L1.2 21.6,17.9 21.9,18.2 v1(21.9,19.2) ; U1_L2.2 36.6,17.9 36.9,18.2 v1(36.9,19.2) ; U1_L3.2 51.6,17.9 51.9,18.2 v1(51.9,19.2) ; U1_L4.2 66.6,17.9 66.9,18.2 v1(66.9,19.2)
  Top Layer w0.4: R11.1 R12.1 4.136,20.922 6.7,18.358 6.7,15.315 M1.2
  Bottom Layer w1: M1.2 3.356,15.079 3.356,17.356 5.2,19.2 v1(66.9,19.2)
"VCU Fault": D6.2 M2.4 R16.1 U1_L4.5 | length 16.8
  Top Layer w0.254: 66.6,11.9 U1_L4.5 ; 67.1,11.125 70.8,14.825 70.8,19.5 72.5,21.2 M2.4
copper on no net:
  other v2: 2.95,10.525 2.95,19.525 2.95,34.525 2.95,43.525
  other v3: 76.96,27.25 76.96,45.25
  other v4: 76.96,9.2 76.96,24.2

## Polygon pours and split planes (outlines as drawn)
GND on Top Layer "Top Layer-GND 1" (solid, pour order 138): 77.354,53.968 71.768,53.968 69.8,51.846 69.8,47.65 71.25,46.2 77.8,46.2 79.254,47.654 79.254,52.068 ccw(c77.354,52.068)
GND on Top Layer "Top Layer-GND 2" (solid, pour order 136): 71.768,53.968
GND on Top Layer "Top Layer-GND 9" (solid, pour order 134): 69.8,51.846
GND on Top Layer "Top Layer-GND 10" (solid, pour order 130): 9.4,54 11.2,51.846 11.2,47.1 9.4,45.3 3,45.3 1.1,47.2 1.1,52.1 cw(c3,52.1) 3,54 9.4,54
"VCU Fault" on Top Layer "Top Layer-VCU Fault" (solid, pour order 128): 61.5,8.1 66.7,8.1 67.5,8.9 67.5,11.6 66.6,12.5 61.5,12.5
"BMS Fault" on Top Layer "Top Layer-BMS Fault" (solid, pour order 116): 46.5,8.1 51.7,8.1 52.5,8.9 52.5,11.6 51.6,12.5 46.5,12.5
"IMD Fault" on Top Layer "Top Layer-IMD Fault" (solid, pour order 110): 31.5,8.1 36.7,8.1 37.5,8.9 37.5,11.6 36.6,12.5 31.5,12.5
"BSPD Fault" on Top Layer "Top Layer-BSPD Fault" (solid, pour order 96): 16.5,8.1 21.7,8.1 22.5,8.9 22.5,11.6 21.6,12.5 16.5,12.5
5V on Top Layer "Top Layer-5V" (solid, pour order 112): 43.284,14.628 42.842,15.07 41.126,15.07 40.669,14.613 40.669,10.935 41.029,10.575 42.904,10.575 43.284,10.955
5V on Top Layer "Top Layer-5V 1" (solid, pour order 106): 28.284,14.628 27.842,15.07 26.126,15.07 25.669,14.613 25.669,10.935 26.029,10.575 27.904,10.575 28.284,10.955
5V on Top Layer "Top Layer-5V 2" (solid, pour order 104): 13.284,14.628 12.842,15.07 11.126,15.07 10.669,14.613 10.669,10.935 11.029,10.575 12.904,10.575 13.284,10.955
GND on Top Layer "Top Layer-GND 3" (solid, pour order 120): 58.8,14.3 59.6,15.1 64.1,15.1 64.8,14.4 65.5,14.4 65.5,14.35 66.1,13.75 66.1,12.95 65.95,12.8 61.4,12.8 61.1,12.5 61.1,10.7 60.5,10.1 59.3,10.1 58.8,10.6
5V on Top Layer "Top Layer-5V 3" (solid, pour order 118): 58.284,14.628 57.842,15.07 56.126,15.07 55.669,14.613 55.669,10.935 56.029,10.575 57.904,10.575 58.284,10.955
GND on Top Layer "Top Layer-GND 4" (solid, pour order 114): 43.8,14.3 44.6,15.1 49.1,15.1 49.8,14.4 50.5,14.4 50.5,14.35 51.1,13.75 51.1,12.95 50.95,12.8 46.4,12.8 46.1,12.5 46.1,10.7 45.5,10.1 44.3,10.1 43.8,10.6
GND on Top Layer "Top Layer-GND 5" (solid, pour order 108): 28.8,14.3 29.6,15.1 34.1,15.1 34.8,14.4 35.5,14.4 35.5,14.35 36.1,13.75 36.1,12.95 35.95,12.8 31.4,12.8 31.1,12.5 31.1,10.7 30.5,10.1 29.3,10.1 28.8,10.6
GND on Top Layer "Top Layer-GND 6" (solid, pour order 102): 11.495,14.116
GND on Top Layer "Top Layer-GND 7" (solid, pour order 100): 11.5,13.262
GND on Top Layer "Top Layer-GND 8" (solid, pour order 98): 13.8,14.3 14.6,15.1 19.1,15.1 19.8,14.4 20.5,14.4 20.5,14.35 21.1,13.75 21.1,12.95 20.95,12.8 16.4,12.8 16.1,12.5 16.1,10.7 15.5,10.1 14.3,10.1 13.8,10.6
"RELAY L3/L4" on Top Layer "Top Layer-RELAY L3/L4 1" (solid, pour order 94): 57.2,38.95 57.2,38.3 58.2,37.3 59.7,37.3 59.7,37.35 64.75,42.4 64.75,44.475 68,47.725 68,50.95 67.45,51.5 65.8,51.5 65.25,50.95 65.25,47.7 57.2,39.65 57.2,38.277
"SDC END" on Top Layer "Top Layer-SDC END 1" (solid, pour order 74): 64.5,51.5 64.5,47.423 59.702,42.625 57.9,42.625 57.375,43.15 57.375,46.475 62.4,51.5
12V on Top Layer "Top Layer-12V 3" (solid, pour order 92): 12.2,38.95 12.2,38.3 13.2,37.3 14.7,37.3 14.7,37.35 19.75,42.4 19.75,44.475 23,47.725 23,50.95 22.45,51.5 20.8,51.5 20.25,50.95 20.25,47.7 12.2,39.65 12.2,38.277
"RELAY L2/L3" on Top Layer "Top Layer-RELAY L2/L3 1" (solid, pour order 90): 42.2,38.95 42.2,38.3 43.2,37.3 44.7,37.3 44.7,37.35 49.75,42.4 49.75,44.475 53,47.725 53,50.95 52.45,51.5 50.8,51.5 50.25,50.95 50.25,47.7 42.2,39.65 42.2,38.277
"RELAY L1/L2" on Top Layer "Top Layer-RELAY L1/L2 1" (solid, pour order 86): 27.2,38.95 27.2,38.3 28.2,37.3 29.7,37.3 29.7,37.35 34.75,42.4 34.75,44.475 38,47.725 38,50.95 37.45,51.5 35.8,51.5 35.25,50.95 35.25,47.7 27.2,39.65 27.2,38.277
no net on Top Layer "Top Layer-No Net 1" (solid, pour order 84): 62.4,51.5
no net on Top Layer "Top Layer-No Net 2" (solid, pour order 76): 62.4,51.5
"RELAY L3/L4" on Top Layer "Top Layer-RELAY L3/L4" (solid, pour order 48): 49.5,51.5 49.5,47.423 44.702,42.625 42.9,42.625 42.375,43.15 42.375,46.475 47.4,51.5
"RELAY L2/L3" on Top Layer "Top Layer-RELAY L2/L3" (solid, pour order 47): 34.5,51.5 34.5,47.423 29.702,42.625 27.9,42.625 27.2,43.325 27.2,46.3 32.4,51.5
12V on Top Layer "Top Layer-12V 2" (solid, pour order 41): 25,47.947
"RELAY L1/L2" on Top Layer "Top Layer-RELAY L1/L2" (solid, pour order 40): 19.5,51.5 19.5,47.423 14.702,42.625 12.9,42.625 12.375,43.15 12.375,46.475 17.4,51.5
12V on Top Layer "Top Layer-12V 4" (solid, pour order 39): 5.168,42.368 15.172,42.368 17.425,40.115 17.425,22.825 15.1,20.5 15.1,16.91 12.39,16.91 10.6,18.7 10.6,38.164 9.514,39.25 5.037,39.25 5.037,42.237
GND on Top Layer "Top Layer-GND" (solid, pour order 37): 7.575,29.037 8.013,28.6 9.6,28.6 10.075,29.075 10.075,37.825 9.175,38.725 6.11,38.725 4.225,36.84 4.225,34.075 7.575,30.725
12V on Top Layer "Top Layer-12V" (solid, pour order 35): 0.4,29
12V on Top Layer "Top Layer-12V 1" (solid, pour order 34): 2.375,33.325 1.8,33.9 1.8,35.1 2.8,36.1 2.8,37.025 6.2,40.425 6.2,41.6 5.431,42.368 0.968,42.368 0.2,41.6 0.2,29.2 0.8,28.6 1.9,28.6 2.375,29.075
no net on Top Layer "Top Layer-No Net" (solid, pour order 33): 3.077,26.884
GND on Bottom Layer "Bottom Layer-GND" (solid, pour order 72): 0,52.46 cw(c2.54,52.46) 2.54,55 77.46,55 cw(c77.46,52.46) 80,52.46 80,2.54 cw(c77.46,2.54) 77.46,0 2.54,0 cw(c2.54,2.54) 0,2.54
AIR_OUT on Bottom Layer "Bottom Layer-NetM4_1" (solid, pour order 26): 77.013,40.426 77.013,28.6 72.5,28.6 72.5,40.426
"SDC END" on Bottom Layer "Bottom Layer-SDC END" (solid, pour order 32): 57.2,43.373 57.2,44.721 57.879,45.4 59.827,45.4 59.827,45.375 62.402,42.8 72.5,42.8 74,43.95 77.013,43.95 77.013,40.525 60.048,40.525
"RELAY L3/L4" on Bottom Layer "Bottom Layer-RELAY L3/L4" (solid, pour order 46): 42.2,44.646 43.102,45.548 44.452,45.548 45.352,44.648 45.352,43.448 46.552,42.248 57.952,42.248 60.4,39.8 60.4,38.096 59.652,37.348 58.152,37.348 57.2,38.3 57.2,39.8 56.4,40.6 44.973,40.6 42.2,43.373
"RELAY L2/L3" on Bottom Layer "Bottom Layer-RELAY L2/L3" (solid, pour order 45): 27.2,44.646 28.102,45.548 29.452,45.548 30.352,44.648 30.352,43.448 31.552,42.248 42.952,42.248 45.4,39.8 45.4,38.096 44.652,37.348 43.152,37.348 42.2,38.3 42.2,39.8 41.4,40.6 29.973,40.6 27.2,43.373
"RELAY L1/L2" on Bottom Layer "Bottom Layer-RELAY L1/L2" (solid, pour order 44): 12.2,44.646 13.102,45.548 14.452,45.548 15.352,44.648 15.352,43.448 16.552,42.248 27.952,42.248 30.4,39.8 30.4,38.096 29.652,37.348 28.152,37.348 27.2,38.3 27.2,39.8 26.4,40.6 14.973,40.6 12.2,43.373
12V on Bottom Layer "Bottom Layer-12V 1" (solid, pour order 43): 15.6,37.9 14.8,37.1 13.3,37.1 11.6,38.8 3.9,38.8 2.95,39.75 2.95,41.15 3.9,42.1 13.1,42.1 15.6,39.6
12V on Bottom Layer "Bottom Layer-12V 2" (solid, pour order 42): 15.6,38.95
12V on Bottom Layer "Bottom Layer-12V" (solid, pour order 38): 60.1,21.7 61,22.6 61,24.6 60.1,25.5 53,25.5 52.3,24.8 52.3,23.5 52,23.2 50.7,23.2 50.3,23.6 50.3,24.9 49.7,25.5 38.1,25.5 37.2,24.6 37.2,23.4 36.8,23 35.6,23 35.3,23.3 35.3,24.5 34.3,25.5 23,25.5 22.3,24.8 22.3,23.6 21.9,23.2 20.7,23.2 20.3,23.6 20.3,24.8 19.6,25.5 12.9,25.5 11.9,24.5 11.9,22.7 12.9,21.7

## Silkscreen, mask and mechanical layers (free items; w line width, h text height)
Top Overlay:
  text "Shutdown Circuit REV 3.0" at 35.6,52.7 h0.85
  text "z" at 24.5,52.641 h1.6
  text "IN" at 17.9,52.5 h1.5
  text "OUT" at 59.5,52.5 h1.5
  text "SET/RESET" at 2.9,21.573 h0.8 r90
  text "BSPD FLT" at 12,6 h1.5
  text "IMD FLT" at 27,6 h1.5
  text "BMS FLT" at 42,6 h1.5
  text "VCU FLT" at 57,6 h1.5
  text "Andrei Divinagracia" at 10.75,1.25 h1.3
  text "3" at 52.25,1 h4.5
Bottom Overlay:
  lines w0.15: 72.5,28.6 72.5,37.5 77,37.5 77,28.6 72.5,28.6 ; 72.5,38 77,38 77,43.9 72.5,43.9 72.5,38
  text "INTERLOCK" at 72.1,40.8 h1
  text "12V" at 8.8,40 h1
  text "GND" at 9.1,36.9 h1
  text "AIRs OUT" at 72.1,36.9 h1 r90
  text "3" at 68.3,25.6 h15
  text "VCU" at 73.6,21.2 h1
  text "BMS" at 73.6,18.2 h1
  text "5V" at 8.2,16 h1
  text "IMD" at 73.6,15.2 h1
  text "SET/RST" at 13,13 h1
  text "BSPD" at 73.6,12.2 h1
BOARD:
  lines w0.15: 0,2.5 ccw(c2.5,2.5) 2.5,0 7.5,0 77.5,0 ccw(c77.5,2.5) 80,2.5 80,5 80,52.5 ccw(c77.5,52.5) 77.5,55 2.5,55 ccw(c2.5,52.5) 0,52.5 0,2.5